# Altium PCB Door Sensor PCB.PcbDoc
Units mm, origin at the board's own origin, x right, y up, seen from the top; angles counter-clockwise.
Board outline 54 x 24 mm, 2 copper layers (Top Layer, Bottom Layer), stack 1.671 mm thick; 11 components, 67 nets, 62 pads, 9 vias.
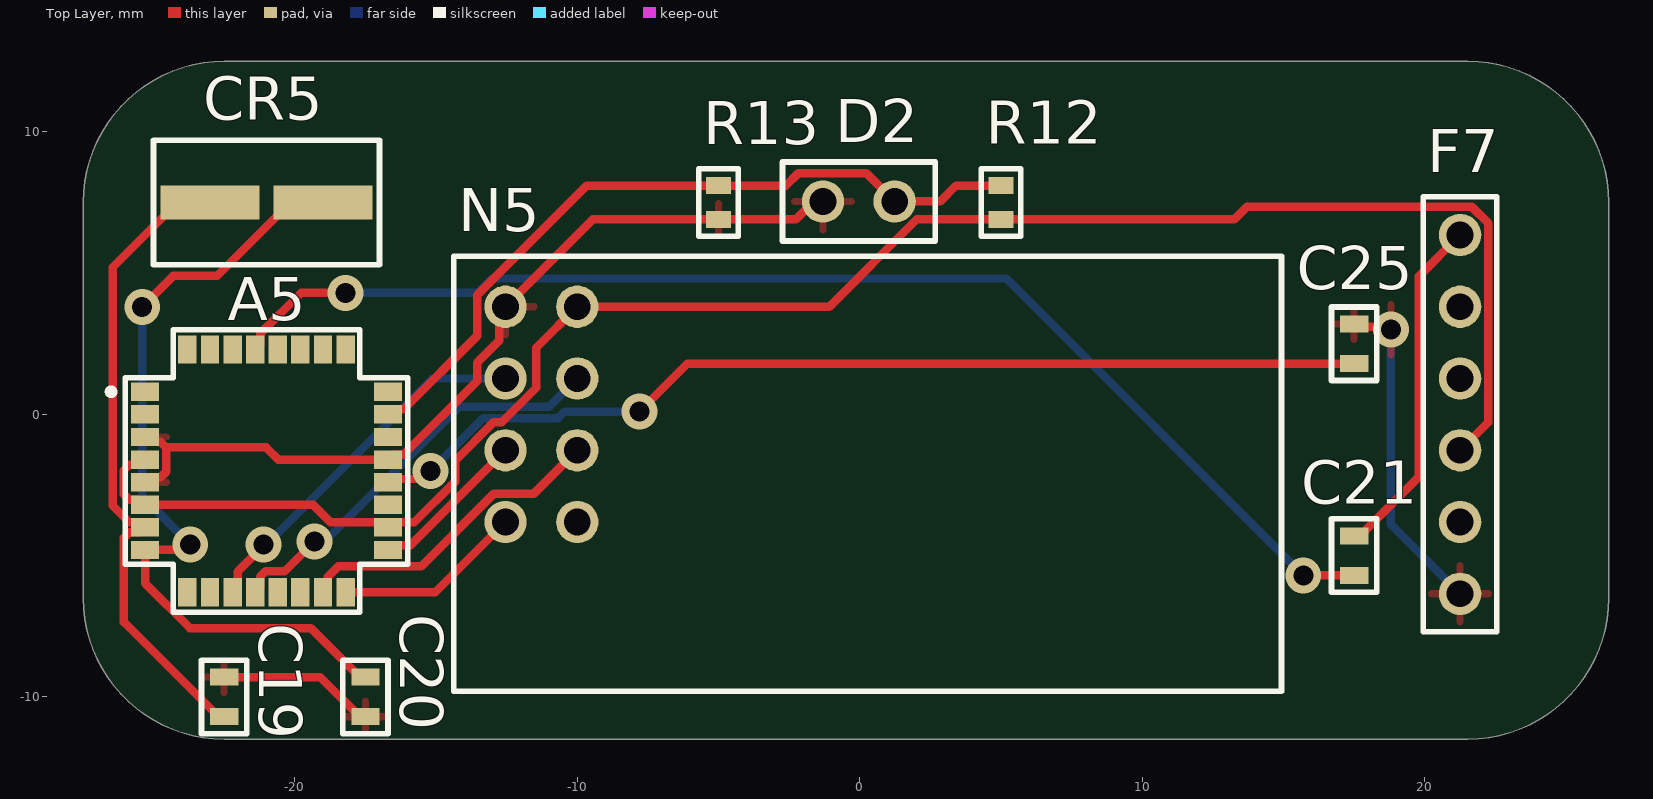
[diagram p0: Top Layer view]
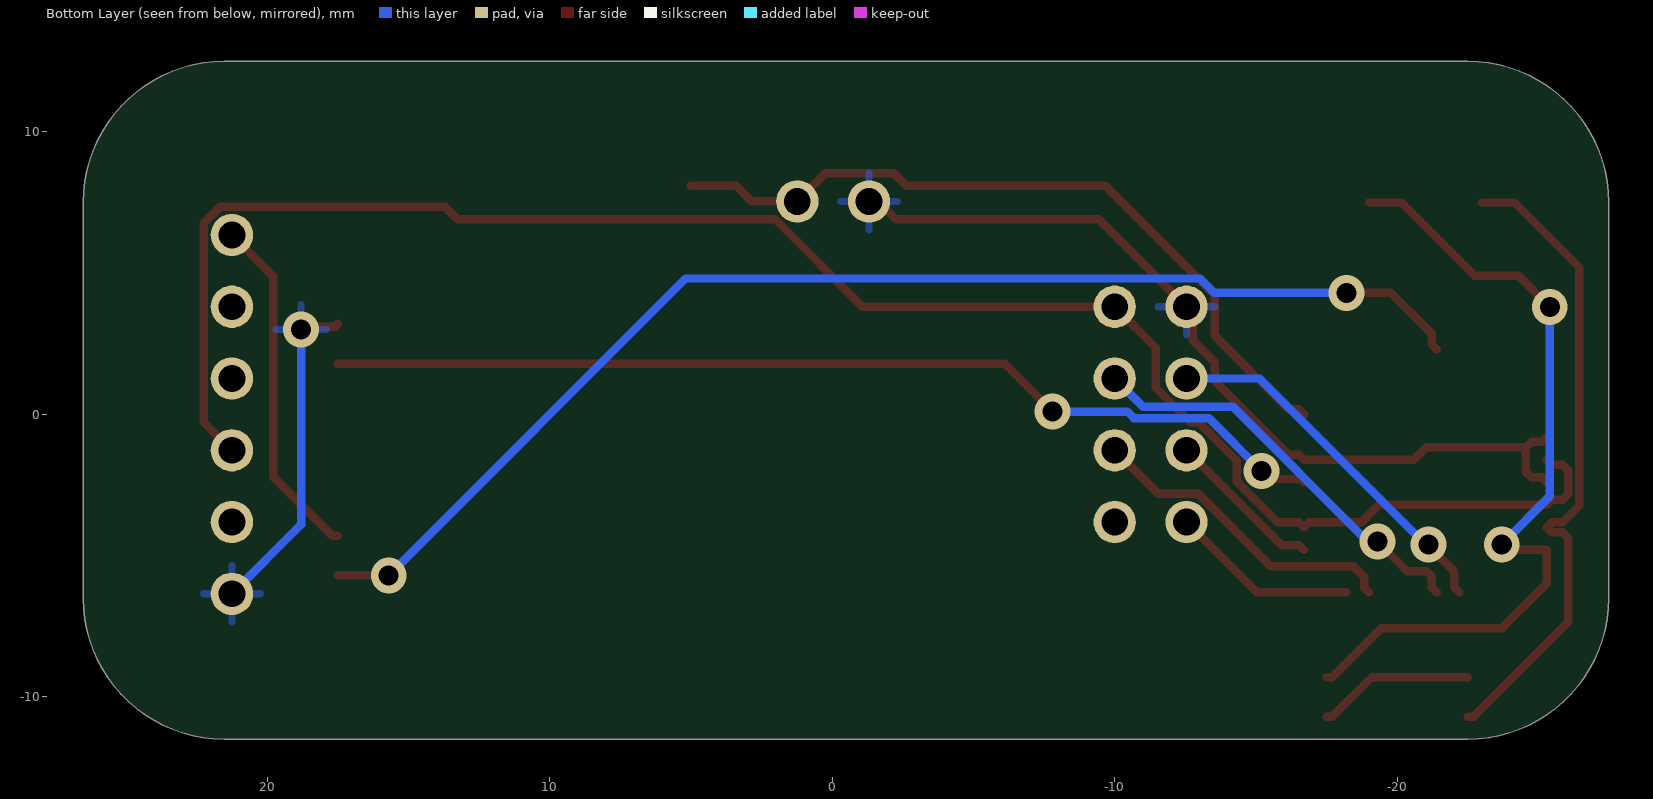
[diagram p1: Bottom Layer view, seen from below]
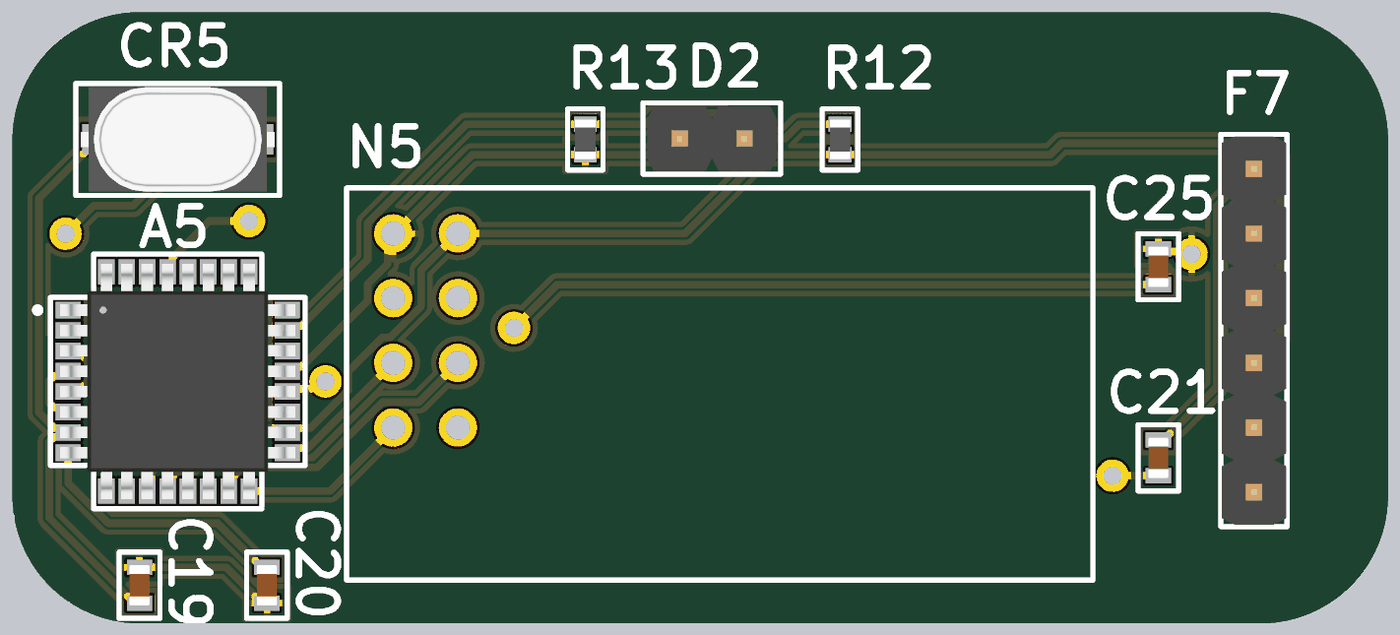
[diagram p2: 3D render of the assembled board from above, using the file's embedded part models]

## Layer stack, top to bottom
Top Solder: solder mask 0.0102, Solder Resist, Dk 3.5
Top Layer: signal copper 0.0356
Dielectric 1: dielectric 1.6, FR-4, Dk 4.8
Bottom Layer: signal copper 0.0356
Bottom Solder: solder mask 0.0102, Solder Resist, Dk 3.5

## Board outline
-27.487,-6.499 -27.487,7.501 cw(c-22.487,7.501) -22.487,12.501 21.513,12.501 cw(c21.513,7.501) 26.513,7.501 26.513,-6.499 cw(c21.513,-6.499) 21.513,-11.499 -22.487,-11.499 cw(c-22.487,-6.499)

## Design rules (kind name [scope] priority, off if disabled: settings)
Clearance [All] p1: gap=0.1 ignorepadtopadclearanceinfootprint=FALSE
HoleToHoleClearance [All] p1: gap=0 allowstackedmicrovias=TRUE
MinimumSolderMaskSliver [All] p1: minsoldermaskwidth=0.1
PolygonConnect [All] p1: connectstyle=Relief reliefconductorwidth=0.254 reliefentries=4 polygonreliefangle="90 Angle" airgapwidth=0.254
RoutingVias [All] p1: holewidth=0.3 width=0.6 viastyle="Through Hole" minholewidth=0.3 minwidth=0.6 maxholewidth=0.3 maxwidth=0.6
SilkToSilkClearance [All] p1: silktosilkclearance=0.1
SilkToSolderMaskClearance [IsPad] p1: minsilkscreentomaskgap=0 clearancetoexposedcopper=TRUE
SolderMaskExpansion [All] p1: expansion=0.102 istentingtop=FALSE
Width [All] p1: maxlimit=0.4 minlimit=0.1 preferedwidth=0.3
26 further rules are at their usual default settings.

## Components (designator, comment, footprint, x,y, rotation, side; value= is the part's Value field where it differs from the comment)
A5 "Atmega 328P" ATMega328P -21,-2 r0 top
C19 "22pF" "22pF Capacitor" -22.5,-10 r270 top
C20 "22pF" "22pF Capacitor" -17.5,-10 r90 top
C21 "0.1uF" "0.1uF Capacitor" 17.5,-5 r270 top
C25 "0.1uF" "0.1uF Capacitor" 17.5,2.5 r90 top
CR5 "16MHz Crystal" "16MHz Crystal" -21,7.5 r180 top
D2 "Reed Switch" "Reed Switch" 0,7.5 r90 top
F7 "FTDI Breakout" FTDI 21.25,0 r0 top
N5 "NRF24L01" NRF24L01 -11.27,0 r0 top
R12 "2.2K" "2.2K Resistor" 5,7.5 r270 top
R13 "2.2K" "2.2K Resistor" -5,7.5 r90 top

## Footprints (in the part's own frame and the unit in brackets; to place one, negate y for a bottom-side part, rotate by r counter-clockwise, add the part's x,y. Pads: shape width x height; smd on the part's side, far side on the other; paste and mask are expansions set on the pad)
"0.1uF Capacitor" [mm]
  rect 0.6x1 smd: 1(-0.7,0) 2(0.7,0)
  silkscreen extent -1.3,-0.8 1.3,0.8, body extent -0.8,-0.4 0.8,0.41, height 0.9
"2.2K Resistor" [mm]
  rect 0.6x0.9 smd: 1(-0.6,0) 2(0.6,0)
  silkscreen extent -1.2,-0.7 1.2,0.7, body extent -0.78,-0.4 0.77,0.4, height 0.54
"16MHz Crystal" [mm]
  rect 3.5x1.2 smd: 1(-2,0) 2(2,0)
  silkscreen extent -4,-2.2 4,2.2, body extent -3.8,-2.05 3.8,2.05, height 2.31
"22pF Capacitor" [mm]
  rect 0.6x1 smd: 1(-0.7,0) 2(0.7,0)
  silkscreen extent -1.3,-0.8 1.3,0.8, body extent -0.8,-0.41 0.8,0.4, height 0.9
ATMega328P [mm]
  rect 1x0.65 smd: 1(-4.3,2.8) 2(-4.3,2) 3(-4.3,1.2) 4(-4.3,0.4) 5(-4.3,-0.4) 6(-4.3,-1.2) 7(-4.3,-2) 8(-4.3,-2.8) 17(4.3,-2.8) 18(4.3,-2) 19(4.3,-1.2) 20(4.3,-0.4) 21(4.3,0.4) 22(4.3,1.2) 23(4.3,2) 24(4.3,2.8)
  rect 0.65x1 smd: 9(-2.8,-4.3) 10(-2,-4.3) 11(-1.2,-4.3) 12(-0.4,-4.3) 13(0.4,-4.3) 14(1.2,-4.3) 15(2,-4.3) 16(2.8,-4.3) 25(2.8,4.3) 26(2,4.3) 27(1.2,4.3) 28(0.4,4.3) 29(-0.4,4.3) 30(-1.2,4.3) 31(-2,4.3) 32(-2.8,4.3)
  silkscreen extent -5.6,-5 5,5, body extent -4.62,-4.62 4.63,4.63, height 1.2
FTDI [mm]
  round 1.5 hole 0.95: 1(0,6.35) 2(0,3.81) 3(0,1.27) 4(0,-1.27) 5(0,-3.81) 6(0,-6.35)
  silkscreen extent -1.3,-7.7 1.3,7.7, body extent -1.27,-7.62 1.27,7.62, height 5.55
NRF24L01 [mm]
  round 1.5 hole 0.95: 1(-1.27,3.81) 2(-1.27,1.27) 3(-1.27,-1.27) 4(-1.27,-3.81) 5(1.27,3.81) 6(1.27,1.27) 7(1.27,-1.27) 8(1.27,-3.81)
  silkscreen extent -3.1,-9.8 26.2,5.6, body extent -2.91,-9.59 26.09,5.41, height 6.21
"Reed Switch" [mm]
  round 1.5 hole 0.95: 1(0.036,1.303) 2(0.036,-1.237)
  silkscreen extent -1.36,-2.67 1.44,2.73, body extent -1.23,-2.52 1.31,2.56, height 5.55

## Part data
A5: library part ATMEGA328PB-AUR, "IC MCU 8BIT 32KB FLASH 32TQFP", Case/Package=TQFP, Frequency=20MHz, Manufacturer=Microchip, Max Operating Temperature=85°C, Min Operating Temperature=-40°C, Supplier Part Number 1=ATMEGA328PB-AURCT-ND, Category=Microcontrollers, ComponentLink1Description=http://www.microchip.com/mymicrochip/filehandler.aspx?ddocname=en589666&src-supplier=Digi-Key, ComponentLink1URL=http://www.microchip.com/mymicrochip/filehandler.aspx?ddocname=en589666&src-supplier=Digi-Key, Core Architecture=AVR, Interface=I2C,SPI,UART,USART, Manufacturer Part Number=ATMEGA328PB-AUR, Memory Size=32KB, Memory Type=FLASH, Number of I/Os=27, Number of Pins=32, Oscillator Type=Internal, Packaging="Tape and Reel", Peripherals="Brown-out Detect/Reset,POR,PWM,WDT", Pricing 1="1=1.42000, 25=1.30000, 100=1.18000 (USD)", RoHS=No, Stock 1=9971, Supplier 1=Digi-Key
C19 C20: library part 06035A220JAT2A, "Cap Ceramic 22pF 50V C0G 5% SMD 0603 125C Paper T/R", Case Code (Imperial)=0603, Case Code (Metric)=1608, Dielectric=C0G, Dielectric Material=Ceramic, Insulation Resistance=100GR, Manufacturer="Kyocera AVX", Max Operating Temperature=125°C, Min Operating Temperature=-55°C, Package Quantity=1, Supplier Part Number 1=478-1167-1-ND, Temperature Coefficient=30ppm/°C, Tolerance=5%, Voltage=50V, Capacitance=22pF, Case/Package=0603, Category="Ceramic Capacitors", ComponentLink1Description=https://datasheet.ciiva.com/11788/0900766b802d4697-11788031.pdf?src-supplier=RSComponents, ComponentLink1URL=https://datasheet.ciiva.com/11788/0900766b802d4697-11788031.pdf?src-supplier=RSComponents, ComponentLink2Description=https://datasheet.ciiva.com/16351/ccog-16351125.pdf?src-supplier=Future+Electronics, ComponentLink2URL=https://datasheet.ciiva.com/16351/ccog-16351125.pdf?src-supplier=Future+Electronics, ComponentLink3Description=https://datasheet.ciiva.com/1124/759117-1124728.pdf?src-supplier=Element14, ComponentLink3URL=https://datasheet.ciiva.com/1124/759117-1124728.pdf?src-supplier=Element14, ComponentLink4Description=https://datasheet.ciiva.com/7855/759117-7855064.pdf?src-supplier=Element14, ComponentLink4URL=https://datasheet.ciiva.com/7855/759117-7855064.pdf?src-supplier=Element14, ComponentLink5Description=https://datasheet.ciiva.com/150/ccog-150366.pdf?src-supplier=Digi-Key, ComponentLink5URL=https://datasheet.ciiva.com/150/ccog-150366.pdf?src-supplier=Digi-Key, ComponentLink6Description=https://datasheet.ciiva.com/150/ccog-150367.pdf?src-supplier=Digi-Key, ComponentLink6URL=https://datasheet.ciiva.com/150/ccog-150367.pdf?src-supplier=Digi-Key, Contact Plating=Tin,Matte, Depth=0.81mm, Height=0.63mm, Lead Free="Lead Free", Length=1.6mm, Manufacturer Part Number=06035A220JAT2A, Mount="Surface Mount,PCB", Number of Pins=2, Packaging="Tape and Reel", Pricing 1="1=0.10000, 10=0.05600, 50=0.03040, 100=0.02480, 500=0.01772, 1000=0.01392 (USD)", Radiation Hardening=No, REACH SVHC="No SVHC", RoHS=Yes, Stock 1=678111, Supplier 1=Digi-Key, Termination=SMD/SMT, Thickness=0.035inch, Voltage Rating=50V, Voltage Rating (DC)=50V, Width=0.81mm
C21 C25: library part 06033C104KAT4A, "CAP CER 0.1UF 25V X7R 0603", Capacitance=100nF, Case Code (Imperial)=0603, Case Code (Metric)=1608, Dielectric=X7R, Manufacturer="Kyocera AVX", Max Operating Temperature=125°C, Min Operating Temperature=-55°C, Package Quantity=1, Supplier Part Number 1=478-7018-1-ND, Tolerance=10%, Voltage Rating=25V, Case/Package=0603, Category="Ceramic Capacitors", ComponentLink1Description=https://datasheet.ciiva.com/22619/1679506-22619862.pdf?src-supplier=Element14, ComponentLink1URL=https://datasheet.ciiva.com/22619/1679506-22619862.pdf?src-supplier=Element14, ComponentLink2Description=https://datasheet.ciiva.com/28613/1679506-28613035.pdf?src-supplier=Element14, ComponentLink2URL=https://datasheet.ciiva.com/28613/1679506-28613035.pdf?src-supplier=Element14, ComponentLink3Description=https://datasheet.ciiva.com/6277/cx7r-6277758.pdf?src-supplier=Digi-Key, ComponentLink3URL=https://datasheet.ciiva.com/6277/cx7r-6277758.pdf?src-supplier=Digi-Key, ComponentLink4Description=https://datasheet.ciiva.com/6277/cx7r-6277759.pdf?src-supplier=Digi-Key, ComponentLink4URL=https://datasheet.ciiva.com/6277/cx7r-6277759.pdf?src-supplier=Digi-Key, Depth=0.81mm, Height=0.9mm, Lead Free="Lead Free", Length=1.6mm, Manufacturer Part Number=06033C104KAT4A, Mount="Surface Mount", Number of Pins=2, Packaging="Tape and Reel", Pricing 1="1=0.10000, 10=0.04200, 50=0.02320, 100=0.01890, 500=0.01348, 1000=0.01059, 2500=0.00962, 5000=0.00886 (USD)", REACH SVHC="No SVHC", RoHS=Yes, Stock 1=6112957, Supplier 1=Digi-Key, Termination=SMD/SMT, Thickness=0.035inch, Voltage Rating (DC)=25V, Width=0.032inch
CR5: library part ECS-160-20-3X-TR, "CRYSTAL 16.0000MHZ 20PF SMD", ESR (Equivalent Series Resistance)=50R, Frequency=16MHz, Frequency Stability=50ppm, Frequency Tolerance=30ppm, Load Capacitance=20pF, Manufacturer="ECS International", Max Operating Temperature=70°C, Min Operating Temperature=-10°C, Package Quantity=1, Supplier Part Number 1=XC1776CT-ND, Category=Crystals, ComponentLink1Description=https://datasheet.ciiva.com/852/csm-3x-852328.pdf?src-supplier=Digi-Key, ComponentLink1URL=https://datasheet.ciiva.com/852/csm-3x-852328.pdf?src-supplier=Digi-Key, ComponentLink2Description=https://datasheet.ciiva.com/852/csm-3x-852329.pdf?src-supplier=Digi-Key, ComponentLink2URL=https://datasheet.ciiva.com/852/csm-3x-852329.pdf?src-supplier=Digi-Key, ComponentLink3Description=https://datasheet.ciiva.com/852/csm-3x-852330.pdf?src-supplier=Digi-Key, ComponentLink3URL=https://datasheet.ciiva.com/852/csm-3x-852330.pdf?src-supplier=Digi-Key, Height=0.091inch, Lead Free="Lead Free", Length=0.276inch, Manufacturer Part Number=ECS-160-20-3X-TR, Mount="Surface Mount", Packaging="Tape and Reel", Pricing 1="1=0.35000, 10=0.28800, 50=0.25880, 100=0.23000, 500=0.21850, 1000=0.18400 (USD)", RoHS=Yes, Stock 1=6685, Supplier 1=Digi-Key, Termination=SMD/SMT, Tolerance=30ppm, Width=0.161inch
D2: library part COM-13247, "Magnetic Door Switch Set", Manufacturer=SparkFun, Supplier Part Number 1=1568-1607-ND, Actuator Material=Magnet, ComponentLink1Description=https://media.digikey.com/pdf/Data%20Sheets/Sparkfun%20PDFs/COM-13247_Web.pdf?src-supplier=Digi-Key, ComponentLink1URL=https://media.digikey.com/pdf/Data%20Sheets/Sparkfun%20PDFs/COM-13247_Web.pdf?src-supplier=Digi-Key, Manufacturer Part Number=COM-13247, Pricing 1="1=3.50000 (USD)", RoHS=No, Stock 1=112, Supplier 1=Digi-Key, Termination="Wire Leads", Type="Reed Switch"
F7: library part FTDI, "FTDI USB to TTL serial converter module"
N5: "3.3V NRF24L01 WIRELESS RF MODULE"
R12 R13: library part RMCF0603JT2K20, "RES TF 1/10W 2.2K OHM 5% 0603", Case Code (Imperial)=0603, Case Code (Metric)=1608, Manufacturer="Stackpole Electronics", Max Operating Temperature=155°C, Max Power Dissipation=100mW, Min Operating Temperature=-55°C, Resistance=2.2kR, Resistor Type="Thick Film", Supplier Part Number 1=RMCF0603JT2K20CT-ND, Temperature Coefficient=100ppm/°C, Tolerance=5%, Case/Package=0603, Category="Chip SMD Resistors", ComponentLink1Description=https://datasheet.ciiva.com/3882/40960751s7172021n1174-3882844.pdf?src-supplier=Arrow+Electronics, ComponentLink1URL=https://datasheet.ciiva.com/3882/40960751s7172021n1174-3882844.pdf?src-supplier=Arrow+Electronics, ComponentLink2Description=https://datasheet.ciiva.com/26919/getdatasheetpartid-360915-26919531.pdf?src-supplier=Verical, ComponentLink2URL=https://datasheet.ciiva.com/26919/getdatasheetpartid-360915-26919531.pdf?src-supplier=Verical, Contact Plating=Tin,Matte, Depth=0.8mm, Features="Automotive AEC-Q200", Height=0.022inch, Lead Free="Lead Free", Length=1.55mm, Manufacturer Part Number=RMCF0603JT2K20, Military Standard=Not, Mount="Surface Mount", Number of Terminations=2, Packaging="Tape and Reel", Power Rating=100mW, Pricing 1="1=0.10000, 10=0.01300, 100=0.00530, 1000=0.00239, 2500=0.00207 (USD)", Radiation Hardening=No, RoHS=Yes, Stock 1=236677, Supplier 1=Digi-Key, Width=0.031inch

## Via types
v1: diameter 1.27, hole 0.711, Top Layer to Bottom Layer, 9 vias

## Nets (pads, with @x,y where several pads share a name; then routed paths per layer and width w, separated by ;. In a path a pad name is that pad's centre, name@x,y a point inside that pad or via, vN(x,y) a via of type N, cw(c..) or ccw(c..) an arc to the next point about the centre after c; other vN are vias at no path point)
2K: 
3.7V: 
100: 
+3V3: A5.4 A5.6 A5.18 F7.4 N5.5 R12.2 | length 65.2
  Top Layer w0.3: A5.4 -25.475,-1.775 -25.854,-1.775 -26.05,-1.971 -26.05,-2.829 -25.854,-3.025 -25.475,-3.025 A5.6 -19.348,-3.2 -18.723,-3.825 -16.875,-3.825 A5.18 -16.525,-3.825 -15.773,-3.825 -14.315,-2.367 -14.315,-1.631 -12.954,-0.27 -12.666,-0.27 -11.448,0.948 -11.448,2.362 N5.5 -1.076,3.81 2.014,6.9 R12.2 13.257,6.9 13.707,7.35 21.664,7.35 22.25,6.764 22.25,-0.27 F7.4
ADC6: 
ADC7: 
C5: 
C12: 
C21: A5.29 C21.2 | length 44.5
  Top Layer w0.3: A5.29 -21.225,2.475 -21.225,2.854 -19.779,4.3 v1(-18.2,4.3) ; v1(15.7,-5.7) C21.2
  Bottom Layer w0.3: v1(-18.2,4.3) -13.529,4.3 -13.019,4.81 5.19,4.81 v1(15.7,-5.7)
C24: 
CE: 
GND: A5.3 A5.5 A5.21 C19.1 C20.1 C25.2 D2.1 F7.6 N5.1 R13.1 | length 48.2
  Top Layer w0.3: A5.5 -25.125,-2.225 -24.746,-2.225 -24.55,-2.029 -24.55,-1.171 ; A5.3 -25.125,-0.975 -24.746,-0.975 -24.55,-1.171 ; C19.1 -19.1,-9.3 -17.7,-10.7 C20.1 ; D2.1 -1.628,7.536 -2.265,6.9 -9.45,6.9 -12.763,3.587 -12.763,2.61 -13.54,1.833 -13.54,1.181 -16.146,-1.425 -16.525,-1.425 A5.21 -20.586,-1.6 -21.014,-1.171 -24.55,-1.171 ; C25.2 17.6,3.1 18.7,3.1 v1(18.8,3)
  Bottom Layer w0.3: v1(18.8,3) 18.8,-3.9 F7.6
NetA1_98: 
NetA2_20: 
NetA3_20: 
NetA4_20: 
NetA5_20: A5.20 C25.1 | length 35.9
  Top Layer w0.3: A5.20 -16.588,-2.288 -15.75,-2.288 -15.462,-2 v1(-15.2,-2) ; v1(-7.8,0.1) -6.1,1.8 C25.1
  Bottom Layer w0.3: v1(-15.2,-2) -13.33,-0.13 -10.68,-0.13 -10.45,0.1 v1(-7.8,0.1)
NetC2_2: 
NetC12_1: 
NetC15_1: 
NetC21_1: C21.1 F7.1 | length 12.3
  Top Layer w0.3: C21.1 17.7,-4.3 19.785,-2.215 19.785,4.885 F7.1
NetC24_1: 
NetC26_1: 
NetF2_2: 
NetG1_1: 
NetG1_2: 
NetO1_8: 
NetQ1_1: 
NetQ2_1: 
NetR4_2: 
NetR5_1: 
NetR5_2: 
OC: 
OD: 
PB0: A5.12 N5.6 | length 14.8
  Top Layer w0.3: A5.12 -21.225,-6.125 -21.225,-5.746 -21.029,-5.55 -20.35,-5.55 v1(-19.3,-4.5)
  Bottom Layer w0.3: v1(-19.3,-4.5) -18.952,-4.5 -14.182,0.27 -11,0.27 N5.6
PB1: 
PB2: 
PB3: A5.15 N5.7 | length 11.3
  Top Layer w0.3: A5.15 -18.825,-6.125 -18.825,-5.746 -18.454,-5.375 -15.519,-5.375 -12.954,-2.81 -11.54,-2.81 N5.7
PB4: A5.16 N5.4 | length 6.7
  Top Layer w0.3: A5.16 -15.03,-6.3 N5.4
PB5: A5.17 N5.3 | length 5.6
  Top Layer w0.3: A5.17 -16.525,-4.625 -15.895,-4.625 N5.3
PB6: A5.7 C19.2 CR5.2 | length 23.1
  Top Layer w0.3: CR5.2 -24.15,7.5 -26.45,5.2 -26.45,-3.229 -25.854,-3.825 -25.475,-3.825 A5.7 -25.475,-4.175 -25.854,-4.175 -26.05,-4.371 -26.05,-7.35 -22.7,-10.7 C19.2
PB7: A5.8 C20.2 CR5.1 | length 29.1
  Top Layer w0.3: v1(-25.4,3.8) -24.3,4.9 -22.75,4.9 -20.15,7.5 CR5.1 ; v1(-23.7,-4.6) -23.886,-4.786 -25.286,-4.786 A5.8 -25.3,-5.979 -23.714,-7.564 -19.436,-7.564 -17.7,-9.3 C20.2
  Bottom Layer w0.3: v1(-25.4,3.8) -25.4,-2.9 v1(-23.7,-4.6)
PC0: A5.23 D2.2 R12.1 R13.2 | length 26.7
  Top Layer w0.3: A5.23 -16.525,0.175 -16.146,0.175 -13.54,2.781 -13.54,4.224 -9.664,8.1 -2.612,8.1 -2.176,8.536 0.237,8.536 D2.2 2.849,7.536 3.412,8.1 R12.1
PC1: 
PC2: 
PC3: 
PC5: 
PD0: F7.3
PD1: F7.2
PD2: 
PD3: 
PD4: 
PD5: 
PD6: 
PD7: A5.11 N5.2 | length 13.1
  Top Layer w0.3: A5.11 -22.025,-6.125 -22.025,-5.569 -21.1,-4.644 v1(-21.1,-4.6)
  Bottom Layer w0.3: v1(-21.1,-4.6) -21,-4.6 -15.13,1.27 N5.2
PE0: 
PE1: 
PE4: 
PE5: 
PF0: 
PH4: 
PH5: 
RS: 
S2: 
SW: 
XTAL1: 
XTAL2: 
pads on no net: A5.1 A5.2 A5.9 A5.10 A5.13 A5.14 A5.19 A5.22 A5.24 A5.25 A5.26 A5.27 A5.28 A5.30 A5.31 A5.32 F7.5 N5.8

## Polygon pours and split planes (outlines as drawn)
GND on Top Layer "NONET_L-01_P-001" (none, remove dead copper, pour order 0): -27.5,16 -27,15.5 27.8,15.5 27.8,-12.2 27.5,-12.5 -27.5,-12.5
GND on Bottom Layer "NONET_L-01_P-001" (none, remove dead copper, pour order 1): -27.5,16.5 27.8,16.5 27.8,-12.5 -27.5,-12.5

## Silkscreen, mask and mechanical layers (free items; w line width, h text height)
Board Outline:
  circle w0.006: c-0.487,0.501 r0.003
  lines w0.013: -27.487,-6.499 ccw(c-22.487,-6.499) -22.487,-11.499 21.513,-11.499 ccw(c21.513,-6.499) 26.513,-6.499 26.513,7.501 ccw(c21.513,7.501) 21.513,12.501 -22.487,12.501 ccw(c-22.487,7.501) -27.487,7.501 -27.487,-6.499